# Altium PCB PCB1.PcbDoc
Units mm, origin at the board's own origin, x right, y up, seen from the top; angles counter-clockwise.
Board outline 50 x 50 mm, 4 copper layers (Top Layer, GND_t, GND_b, Bottom Layer), stack 0.442 mm thick; 82 components, 56 nets, 309 pads, 342 vias.
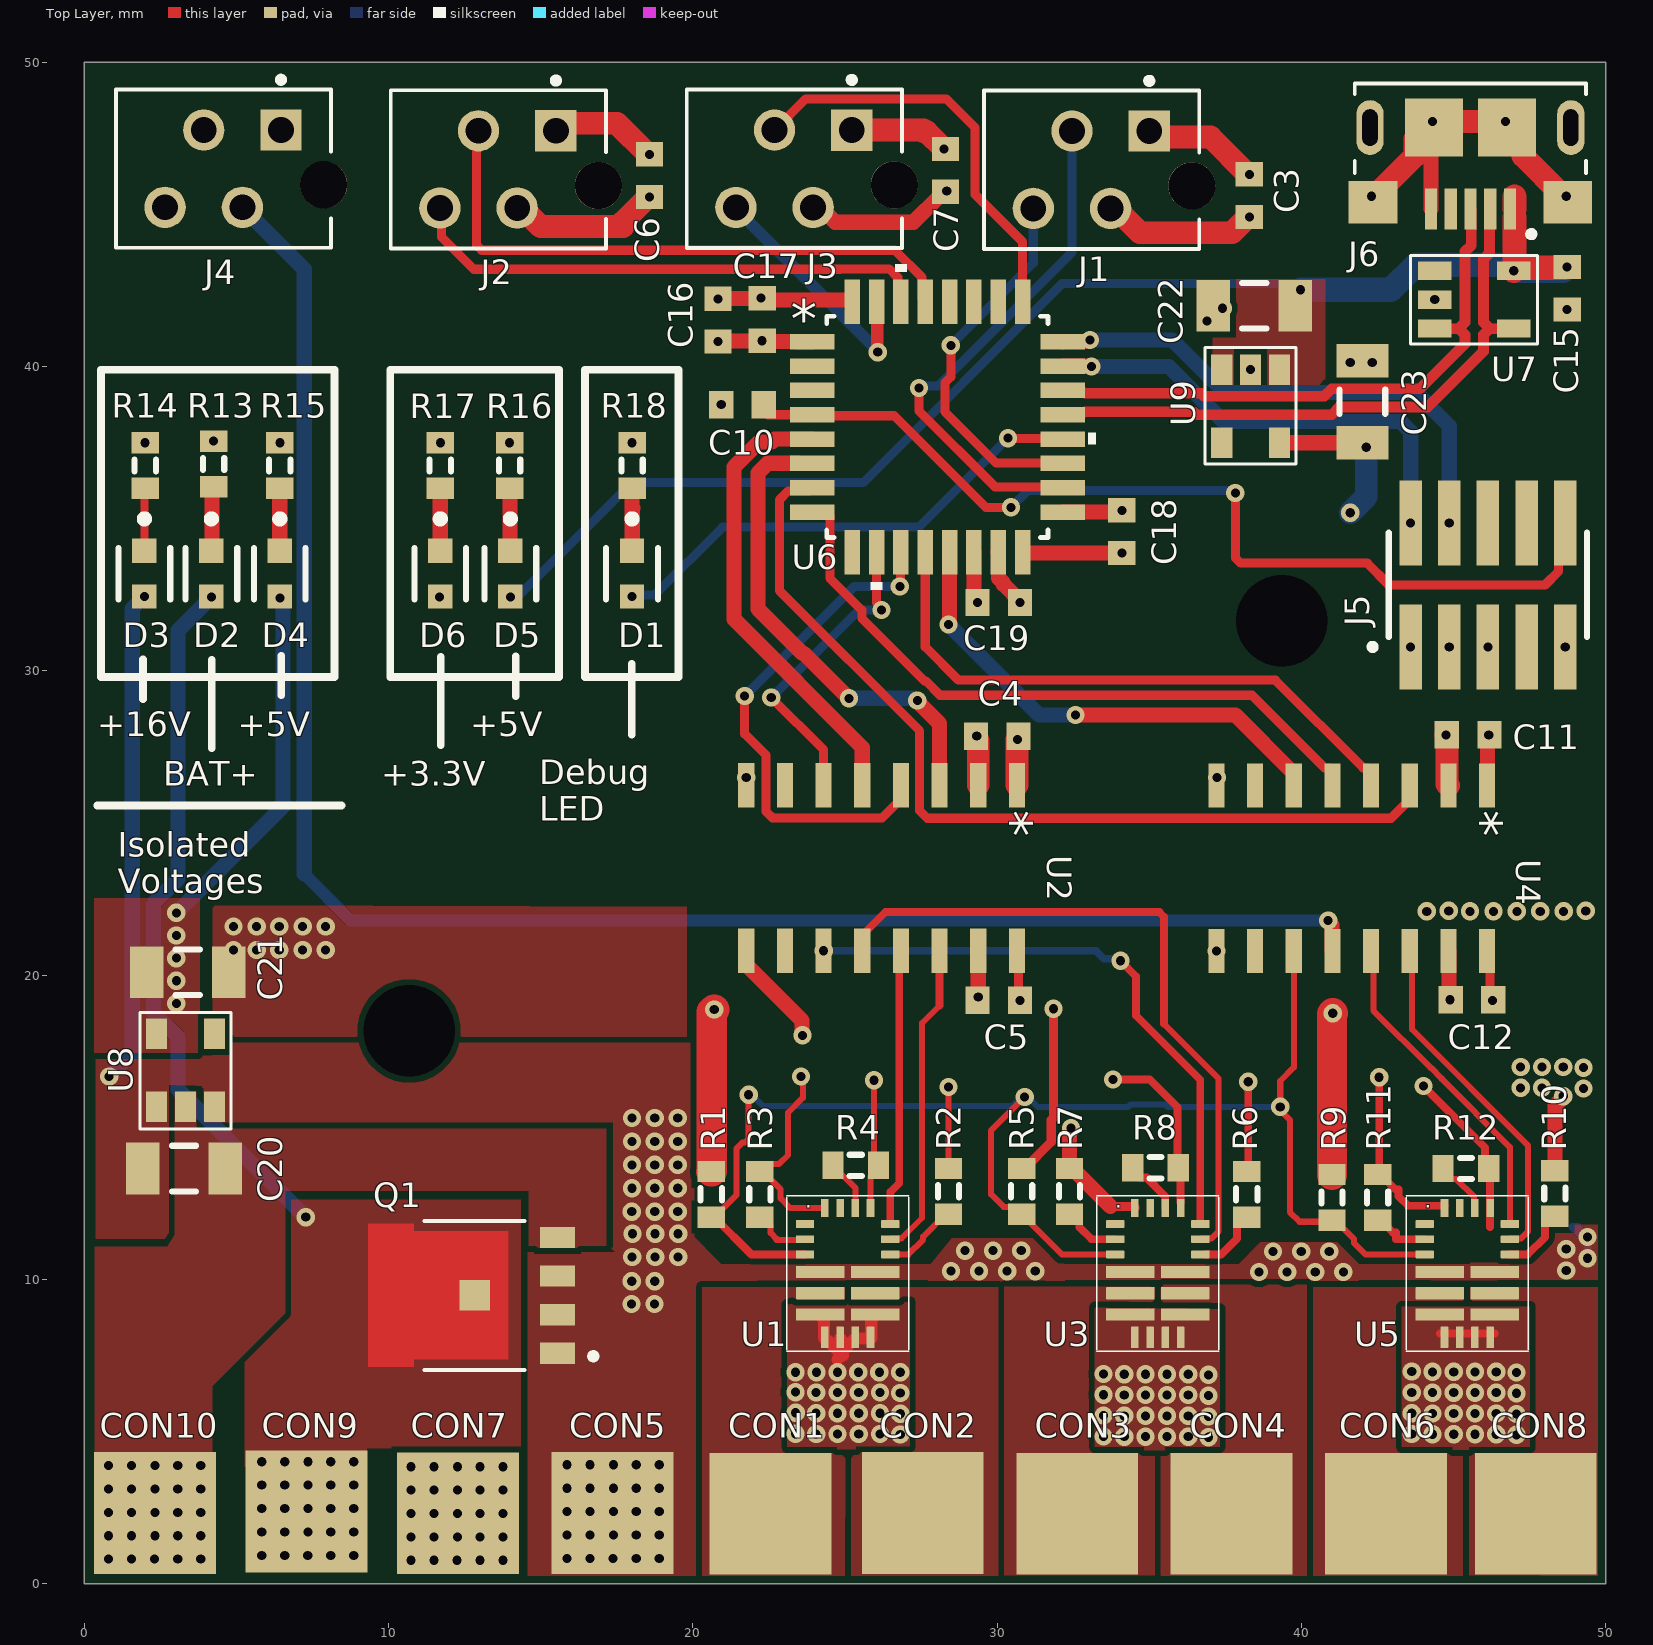
[diagram p0: Top Layer view]
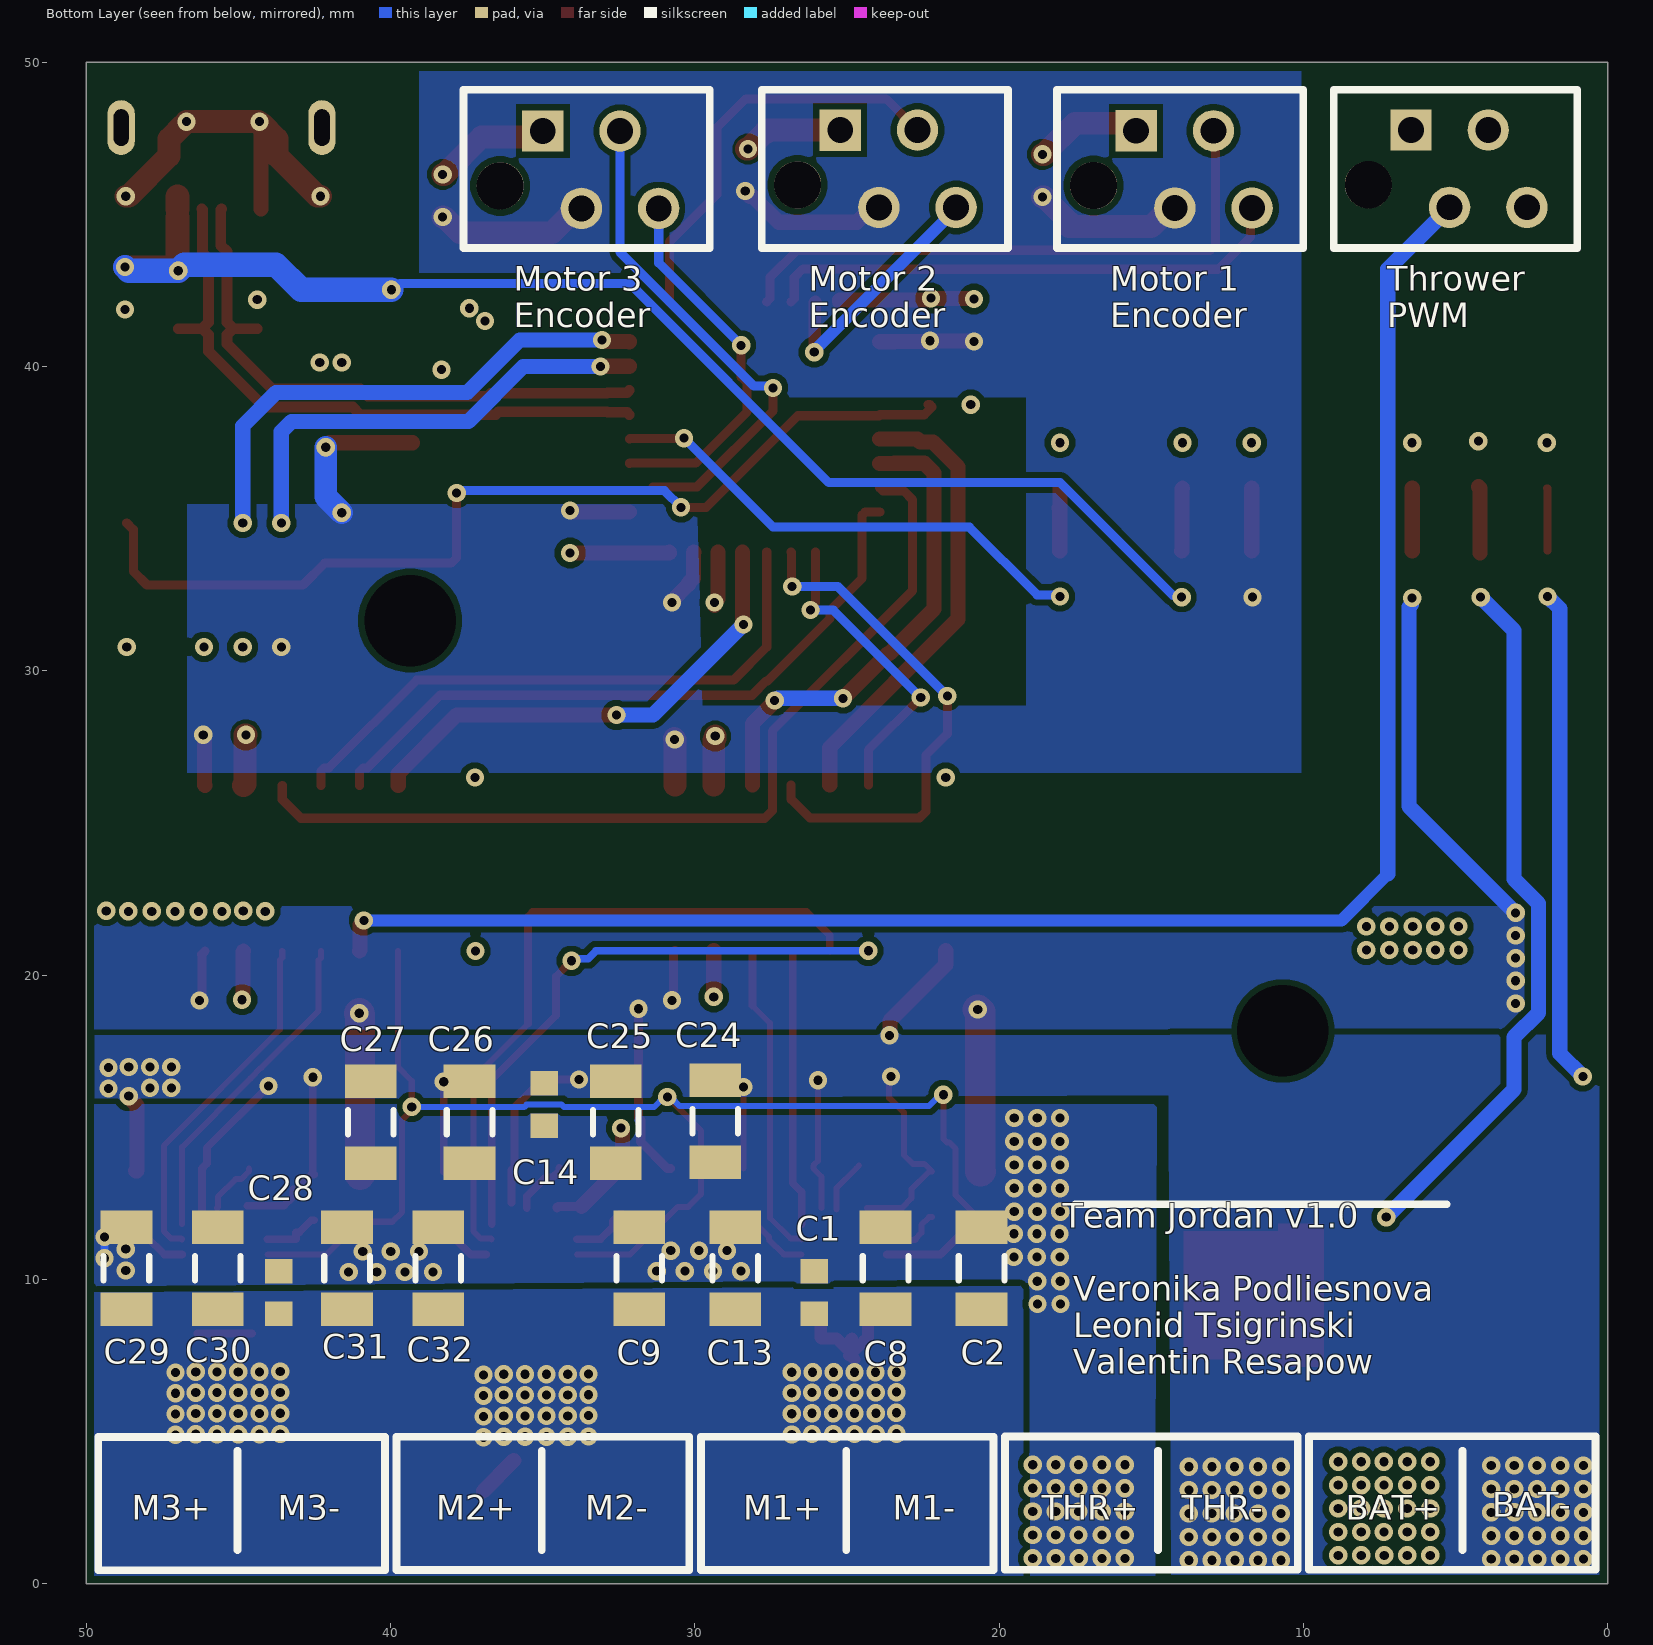
[diagram p1: Bottom Layer view, seen from below]
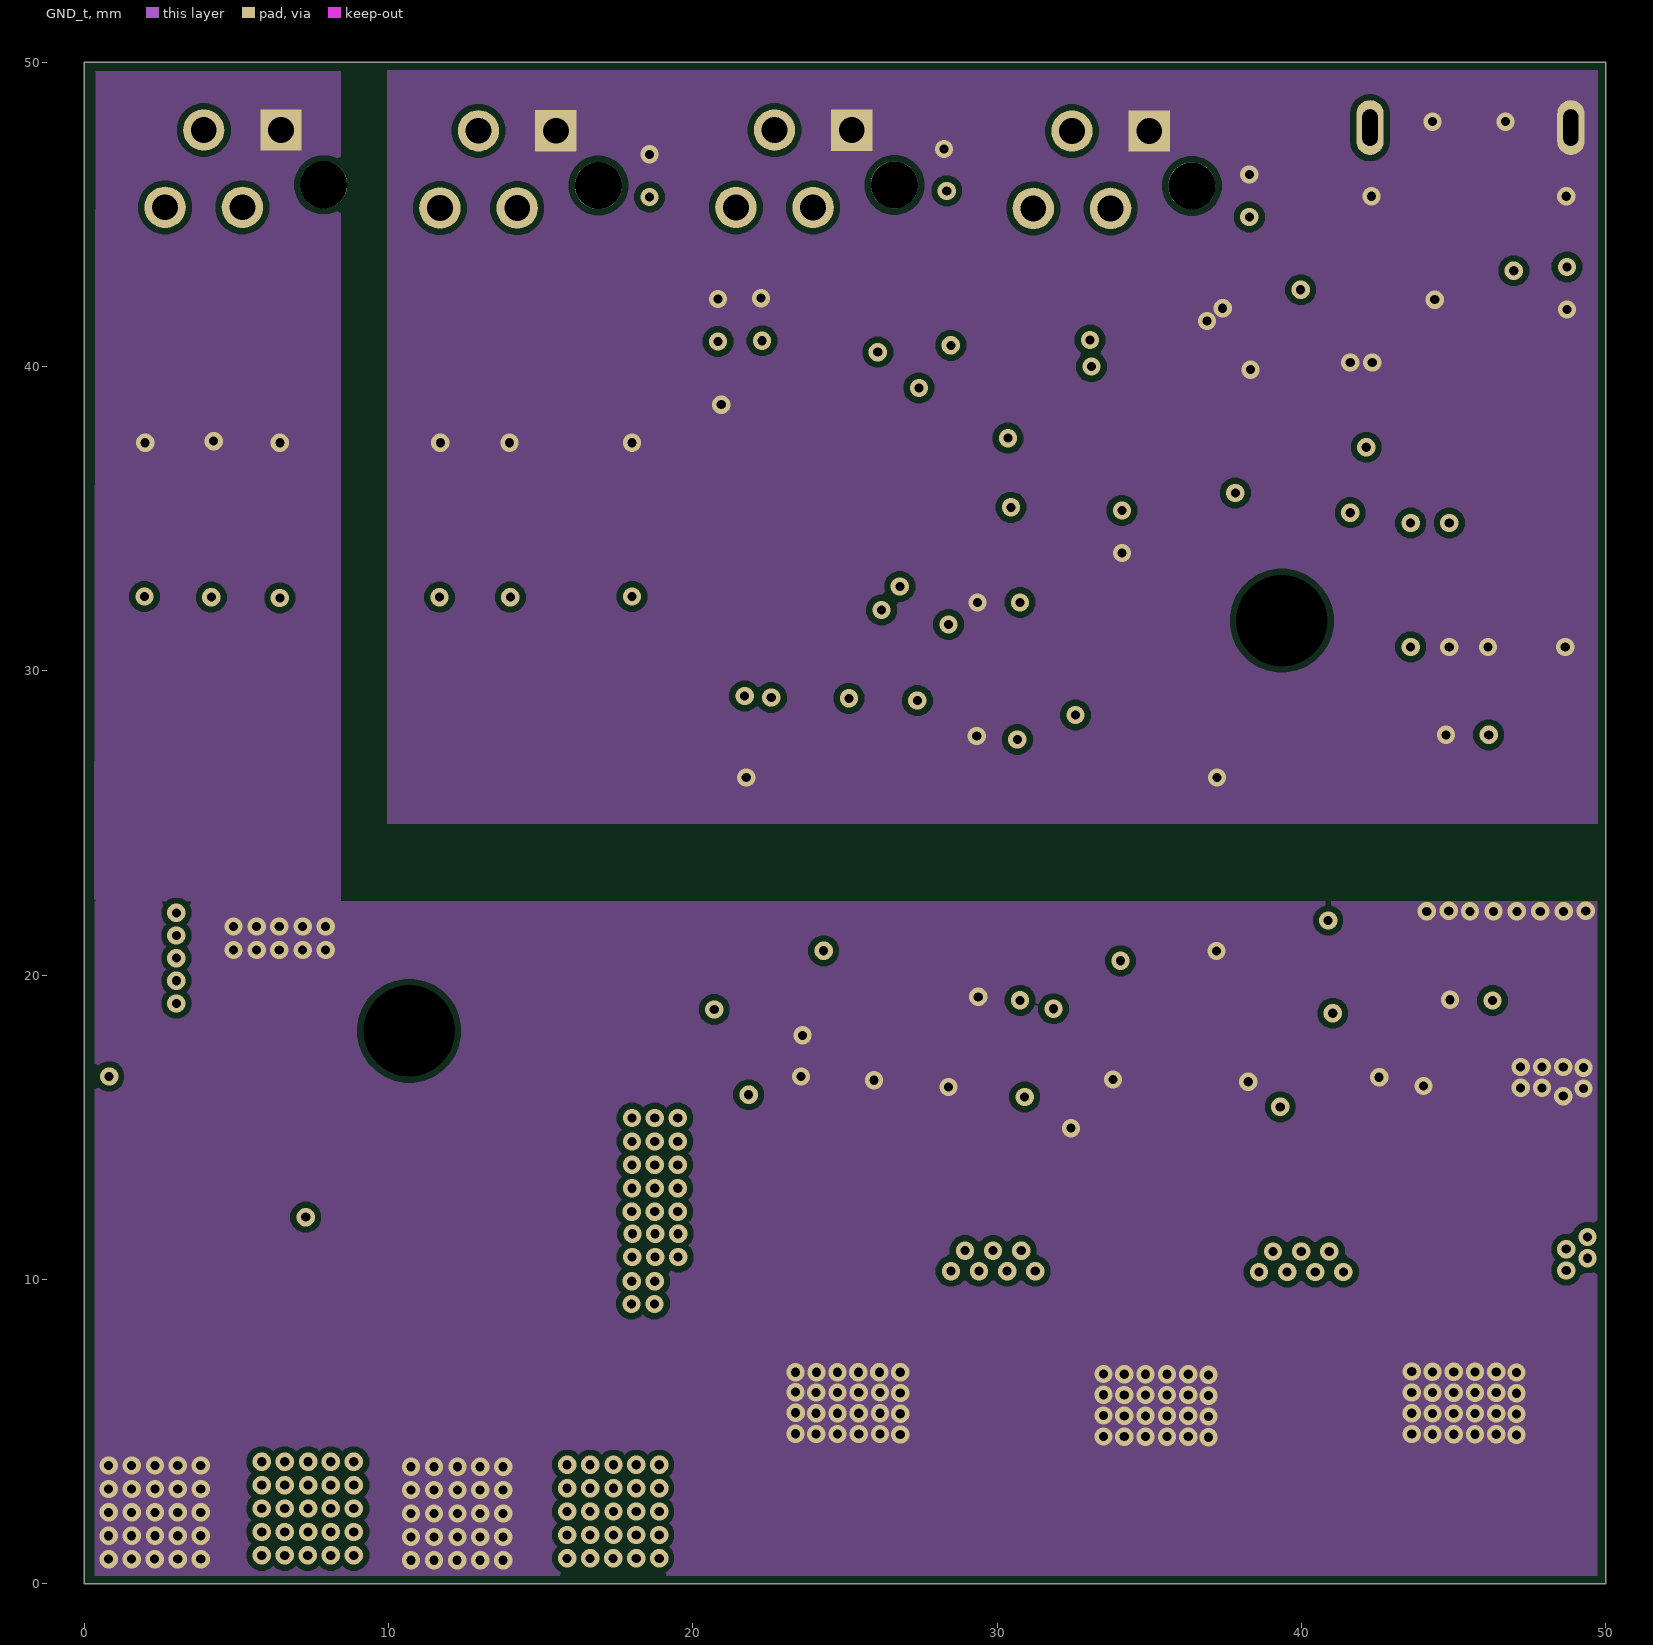
[diagram p2: GND_t]
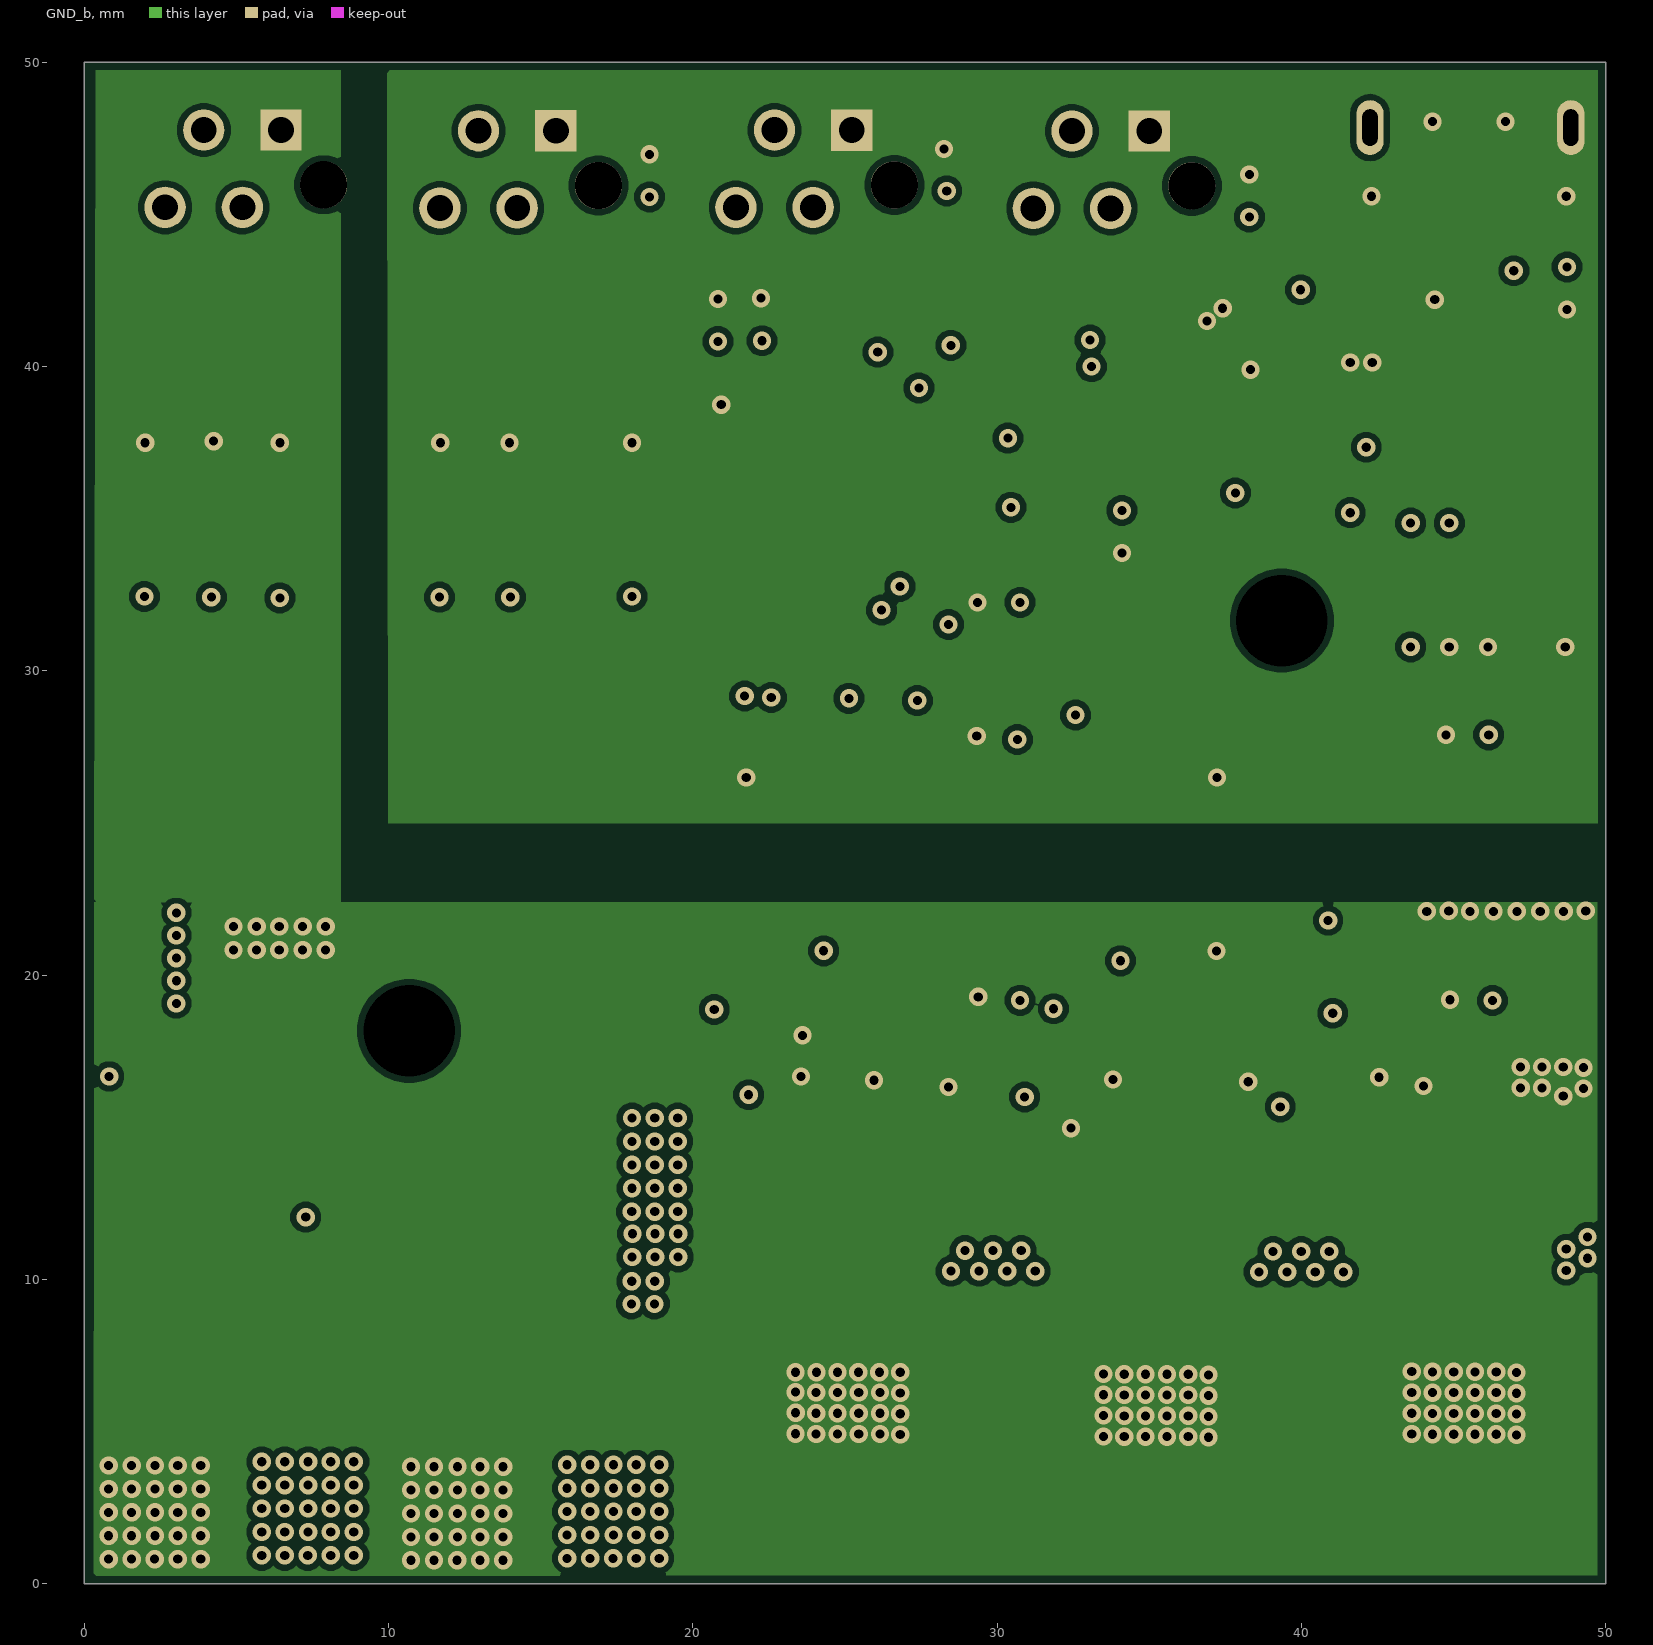
[diagram p3: GND_b]

## Layer stack, top to bottom
Top Solder: solder mask 0.0102, Solder Resist, Dk 3.5
Top Layer: signal copper 0.035
Dielectric 2: prepreg 0.1, PP-006, Dk 4.1
GND_t: signal copper 0.035
Dielectric 1: core 0.1016, Core-009, Dk 4.5
GND_b: signal copper 0.035
Dielectric 3: prepreg 0.1, PP-006, Dk 4.1
Bottom Layer: signal copper 0.035
Bottom Solder: solder mask 0.0102, Solder Resist, Dk 3.5

## Board outline
0,0 50,0 50,50 0,50

## Design rules (kind name [scope] priority, off if disabled: settings)
BoardOutlineClearance [All] p1: gap=0.254 ignorepadtopadclearanceinfootprint=FALSE except(0: Arc-SplitContinuation Track-SplitContinuation SMDPad-SplitContinuation THPad-SplitContinuation Via-SplitContinuation Fill-SplitContinuation Poly-SplitContinuation Region-SplitContinuation Text-SplitContinuation)
Clearance [All] p1: gap=0.2 ignorepadtopadclearanceinfootprint=TRUE except(0: Arc-Hole Track-Hole SMDPad-Hole THPad-Hole Via-Hole Fill-Hole Poly-Hole Region-Hole Text-Hole)
DiffPairsRouting [All] p1: maxlimit=0.254 minlimit=0.254 mostfreqgap=0.254 toplayer_minwidth=0.35 toplayer_maxwidth=0.381 toplayer_prefwidth=0.381 midlayer1_minwidth=0.35 midlayer1_maxwidth=0.381 midlayer1_prefwidth=0.381 midlayer2_minwidth=0.35 midlayer2_maxwidth=0.381 midlayer2_prefwidth=0.381 bottomlayer_minwidth=0.35 bottomlayer_maxwidth=0.381 bottomlayer_prefwidth=0.381 maxuncoupledlength=12.7
HoleSize [All] p1: absolutevalues=TRUE maxlimit=6 minlimit=0.025 maxpercent=80.000 minpercent=20.000
MinimumSolderMaskSliver [All] p1: minsoldermaskwidth=0.1
PolygonConnect [All] p1: connectstyle=Direct reliefconductorwidth=0.254 reliefentries=4 polygonreliefangle="90 Angle" airgapwidth=0.254
RoutingVias [All] p1: holewidth=0.3 width=0.6 viastyle="Through Hole" minholewidth=0.2 minwidth=0.45 maxholewidth=3 maxwidth=5
SolderMaskExpansion SolderMaskExpansionVIia [IsVia] p1: expansion=0.05 istentingtop=TRUE
SolderMaskExpansion SolderMaskExpansion_1 [All] p2: expansion=0.102 istentingtop=FALSE
Width [All] p1: maxlimit=2 minlimit=0.1 preferedwidth=0.254
27 further rules are at their usual default settings.

## Classes and differential pairs
differential pair class diff_USB: USB_D
component class Motorcontroller: C1 C2 C3 C4 C5 C6 C7 C8 C9 C11 C12 C13 C14 C24 C25 C26 C27 C28 C29 C30 C31 C32 CON1 CON2 CON3 CON4 CON5 CON6 CON7 CON8 J1 J2 J3 J4 R1 R2 R3 R4 R5 R6 R7 R8 R9 R10 R11 R12 U1 U2 U3 U4 U5
component class Mainboard: C10 C15 C16 C17 C18 C19 C20 C21 C22 C23 CON9 CON10 D1 D2 D3 D4 D5 D6 J5 J6 Q1 R13 R14 R15 R16 R17 R18 U6 U7 U8 U9
differential pair USB_D: +USB_D_P -USB_D_N

## Components (designator, comment, footprint, x,y, rotation, side; value= is the part's Value field where it differs from the comment)
C1 "Cap Semi" 1608[0603] 26.075,9.575 r90 bottom value=100nF
C2 "Cap Semi" C1206 20.575,10.375 r90 bottom value=1uF
C3 "Cap Semi" 1608[0603] 38.284,45.616 r270 top value=100nF
C4 "Cap Semi" 1608[0603] 30,27.85 r180 top value=100nF
C5 "Cap Semi" 1608[0603] 30.05,19.175 r180 top value=100nF
C6 "Cap Semi" 1608[0603] 18.574,46.275 r270 top value=100nF
C7 "Cap Semi" 1608[0603] 28.3,46.45 r270 top value=100nF
C8 "Cap Semi" C1206 23.729,10.375 r90 bottom value=1uF
C9 "Cap Semi" C1206 31.825,10.375 r90 bottom value=1uF
C10 "Cap Semi" 1608[0603] 21.629,38.75 r0 top value=100nF
C11 "Cap Semi" 1608[0603] 45.475,27.9 r180 top value=100nF
C12 "Cap Semi" 1608[0603] 45.6,19.2 r180 top value=100nF
C13 "Cap Semi" C1206 28.671,10.375 r90 bottom value=1uF
C14 "Cap Semi" 1608[0603] 34.95,15.75 r270 bottom value=100nF
C15 "Cap Semi" 1608[0603] 48.725,42.575 r90 top value=100nF
C16 "Cap Semi" 1608[0603] 20.824,41.525 r270 top value=1uF
C17 "Cap Semi" 1608[0603] 22.279,41.55 r270 top value=10nF
C18 "Cap Semi" 1608[0603] 34.096,34.575 r90 top value=100nF
C19 "Cap Semi" 1608[0603] 30.05,32.25 r0 top value=100nF
C20 "Cap Semi" C1206 3.275,13.646 r180 top value=1uF
C21 "Cap Semi" C1206 3.4,20.1 r180 top value=1uF
C22 "Cap Semi" C1206 38.45,42 r0 top value=1uF
C23 "Cap Semi" C1206 42,38.85 r270 top value=1uF
C24 "Cap Semi" C1206 29.325,15.2 r270 bottom value=1uF
C25 "Cap Semi" C1206 32.596,15.169 r270 bottom value=1uF
C26 "Cap Semi" C1206 37.4,15.169 r270 bottom value=1uF
C27 "Cap Semi" C1206 40.65,15.169 r270 bottom value=1uF
C28 "Cap Semi" 1608[0603] 43.675,9.575 r90 bottom value=100nF
C29 "Cap Semi" C1206 48.675,10.375 r90 bottom value=1uF
C30 "Cap Semi" C1206 45.675,10.375 r90 bottom value=1uF
C31 "Cap Semi" C1206 41.425,10.375 r90 bottom value=1uF
C32 "Cap Semi" C1206 38.425,10.375 r90 bottom value=1uF
CON1 "Moter1 +" con_soldering 22.65,2.3 r0 top
CON2 "Motor1 -" con_soldering 27.65,2.325 r0 top
CON3 "Motor2 +" con_soldering 32.725,2.3 r0 top
CON4 "Motor2 -" con_soldering 37.8,2.3 r0 top
CON5 "Thrower +" con_soldering 17.458,2.325 r0 top
CON6 "Motor3 +" con_soldering 42.875,2.3 r0 top
CON7 "Thrower -" con_soldering 12.383,2.325 r0 top
CON8 "Motor3 -" con_soldering 47.8,2.3 r0 top
CON9 "BAT+" con_soldering 7.403,2.375 r0 top
CON10 "BAT-" con_soldering 2.325,2.425 r90 top
D1 "LTST-C190GKT" FP-LTST-C190GKT-MFG 18,33.196 r270 top
D2 "LTST-C190GKT" FP-LTST-C190GKT-MFG 4.175,33.196 r270 top
D3 "LTST-C190GKT" FP-LTST-C190GKT-MFG 1.975,33.196 r270 top
D4 "LTST-C190GKT" FP-LTST-C190GKT-MFG 6.425,33.196 r270 top
D5 "LTST-C190GKT" FP-LTST-C190GKT-MFG 14,33.196 r270 top
D6 "LTST-C190GKT" FP-LTST-C190GKT-MFG 11.696,33.196 r270 top
J1 "Encoder_1" TE_7-215079-4 34.995,47.74 r0 top
J2 "Encoder_2" TE_7-215079-4 15.495,47.75 r0 top
J3 "Encoder_3" TE_7-215079-4 25.221,47.771 r0 top
J4 "PWM_thrower" TE_7-215079-4 6.465,47.775 r0 top
J5 "FTSH-105-XX-X-DV" SAMTEC_FTSH-105-XX-X-DV 46.125,32.825 r0 top
J6 "10118193-0001LF" FCI_10118193-0001LF 45.55,47.854 r180 top
Q1 "BUK6Y10-30P" TRANS_PSMN5R5-60YS,115 12.825,9.48 r180 top
R1 "Res3" J1-0603 20.6,12.8 r90 top value=1K
R2 "Res3" J1-0603 28.4,12.9 r90 top value=1K
R3 "Res3" J1-0603 22.2,12.8 r90 top value=1K
R4 "Res3" J1-0603 25.35,13.75 r0 top value=1K
R5 "Res3" J1-0603 30.8,12.9 r90 top value=1K
R6 "Res3" J1-0603 38.2,12.8 r90 top value=1K
R7 "Res3" J1-0603 32.375,12.9 r90 top value=1K
R8 "Res3" J1-0603 35.2,13.675 r0 top value=1K
R9 "Res3" J1-0603 41,12.7 r90 top value=1K
R10 "Res3" J1-0603 48.326,12.826 r90 top value=1K
R11 "Res3" J1-0603 42.5,12.7 r90 top value=1K
R12 "Res3" J1-0603 45.4,13.65 r0 top value=1K
R13 "Res3" J1-0603 4.25,36.8 r270 top value=1K
R14 "Res3" J1-0603 2,36.75 r270 top value=1K
R15 "Res3" J1-0603 6.425,36.75 r270 top value=1K
R16 "Res3" J1-0603 13.975,36.75 r270 top value=1K
R17 "Res3" J1-0603 11.7,36.75 r270 top value=1K
R18 "Res3" J1-0603 18,36.75 r270 top value=1K
U1 "PDRV8243HRXYQ1" DRV8243_motor_driver 25.087,10.2 r0 top
U2 "MAX14930AASE+" 21-0041_S16+1_MXM 26.2,23.525 r270 top
U3 "PDRV8243HRXYQ1" DRV8243_motor_driver 35.275,10.2 r0 top
U4 "MAX14930AASE+" 21-0041_S16+1_MXM 41.65,23.516 r270 top
U5 "PDRV8243HRXYQ1" DRV8243_motor_driver 45.446,10.2 r0 top
U6 "STM32G441KBT6" LQFP-32 28.035,38.018 r0 top
U7 "CM1223_ESD" CM1223_ESD 45.675,42.2 r270 top
U8 "NCV8730" NCP164CSN330T1G_Voltage_regulator 3.325,16.875 r180 top
U9 "NCP164" NCP164CSN330T1G_Voltage_regulator 38.325,38.7 r0 top

## Footprints (in the part's own frame and the unit in brackets; to place one, negate y for a bottom-side part, rotate by r counter-clockwise, add the part's x,y. Pads: shape width x height; smd on the part's side, far side on the other; paste and mask are expansions set on the pad)
21-0041_S16+1_MXM [mm]
  rect 1.456x0.533 smd paste+0 mask+0: 1(-2.722,4.445) 2(-2.722,3.175) 3(-2.722,1.905) 4(-2.722,0.635) 5(-2.722,-0.635) 6(-2.722,-1.905) 7(-2.722,-3.175) 8(-2.722,-4.445) 9(2.722,-4.445) 10(2.722,-3.175) 11(2.722,-1.905) 12(2.722,-0.635) 13(2.722,0.635) 14(2.722,1.905) 15(2.722,3.175) 16(2.722,4.445)
  body extent -3.1,-4.95 3.1,4.95, height 1.76
1608[0603] [mm] "Chip Capacitor, Body 1.6x0.8mm, IPC High Density"
  rect 0.8x0.9 smd: 1(-0.7,0) 2(0.7,0)
  body extent -0.87,-0.48 0.87,0.48, height 1.3
C1206 [mm] "Chip Capacitor, Body 3.2x1.6mm, IPC High Density"
  rect 1.1x1.7 smd: 1(-1.35,0) 2(1.35,0)
  silkscreen extent -0.4,-0.75 0.4,0.75, body extent -1.7,-0.9 1.7,0.9, height 1.3
CM1223_ESD [mm]
  rect 0.6x1.1 smd: 1(-0.95,-1.3) 2(0,-1.3) 3(0.95,-1.3) 4(0.95,1.3) 5(-0.95,1.3)
  silkscreen extent -1.45,-2.1 1.45,2.08
con_soldering [mm]
  rect 4x4 smd: 1(-0.1,0)
DRV8243_motor_driver [mm]
  rrect10% 0.6x0.25 smd: 1(-1.4,1.625) 2(-1.4,1.125) 3(-1.4,0.625) 8(1.4,0.625) 9(1.4,1.125) 10(1.4,1.625)
  rrect10% 1.6x0.4 smd: 4(-0.9,0.05) 4(0.9,0.05) 5(-0.9,-0.65) 6(-0.9,-1.35) 6(0.9,-1.35) 7(0.9,-0.65)
  rrect10% 0.25x0.7 smd: 6(-0.75,-2.1) 6(-0.25,-2.1) 6(0.25,-2.1) 6(0.75,-2.1)
  rrect10% 0.25x0.6 smd: 11(0.75,2.15) 12(0.25,2.15) 13(-0.25,2.15) 14(-0.75,2.15)
  silkscreen extent -2,-2.55 2,2.55
FCI_10118193-0001LF [mm]
  rect 0.4x1.35 smd: 1(-1.3,2.675) 2(-0.65,2.675) 3(0,2.675) 4(0.65,2.675) 5(1.3,2.675)
  rect 1.6x1.4 smd: S1(-3.2,2.45) S2(3.2,2.45)
  rect 1.9x1.9 smd: S3(1.2,0) S4(-1.2,0)
  oval 0.9x1.8 hole 0.5 slot 1.2 at 90 deg: S5(-3.3,0) S6(3.3,0)
  silkscreen extent -3.8,-1.45 3.8,3.6
FP-LTST-C190GKT-MFG [mm]
  rect 0.8x0.8 smd paste+0 mask+0: 1(-0.75,0) 2(0.75,0)
  silkscreen extent -1.92,-0.85 0.85,0.85, body extent -1.25,-0.55 1.25,0.55, height 0.25
J1-0603 [mm] "Chip Resistor, Body 1.6x0.8mm, IPC High Density"
  rect 0.7x0.9 smd: 1(-0.75,0) 2(0.75,0)
  silkscreen extent -0.2,-0.35 0.2,0.35, body extent -0.85,-0.48 0.85,0.48, height 0.9
LQFP-32 [mm]
  rect 1.462x0.507 smd paste+0 mask+0: 1(-4.115,2.8) 2(-4.115,2) 3(-4.115,1.2) 4(-4.115,0.4) 5(-4.115,-0.4) 6(-4.115,-1.2) 7(-4.115,-2) 8(-4.115,-2.8) 17(4.115,-2.8) 18(4.115,-2) 19(4.115,-1.2) 20(4.115,-0.4) 21(4.115,0.4) 22(4.115,1.2) 23(4.115,2) 24(4.115,2.8)
  rect 0.507x1.462 smd paste+0 mask+0: 9(-2.8,-4.115) 10(-2,-4.115) 11(-1.2,-4.115) 12(-0.4,-4.115) 13(0.4,-4.115) 14(1.2,-4.115) 15(2,-4.115) 16(2.8,-4.115) 25(2.8,4.115) 26(2,4.115) 27(1.2,4.115) 28(0.4,4.115) 29(-0.4,4.115) 30(-1.2,4.115) 31(-2,4.115) 32(-2.8,4.115)
  silkscreen extent -3.63,-5.35 5.21,5.35, body extent -4.5,-4.5 4.5,4.5, height 1.6
NCP164CSN330T1G_Voltage_regulator [mm] "For NCP164CSN330T1G_Voltage_regulator and for NCV8730"
  rect 0.7x1 smd: 1(0.95,1.2) 2(0,1.2) 3(-0.95,1.2) 4(-0.95,-1.2) 5(0.95,-1.2)
  silkscreen extent -1.5,-1.9 1.5,1.92
SAMTEC_FTSH-105-XX-X-DV [mm]
  rect 0.74x2.79 smd: 01(-2.54,-2.035) 02(-2.54,2.035) 03(-1.27,-2.035) 04(-1.27,2.035) 05(0,-2.035) 06(0,2.035) 07(1.27,-2.035) 08(1.27,2.035) 09(2.54,-2.035) 10(2.54,2.035)
  silkscreen extent -3.89,-2.13 3.26,1.72, body extent -3.17,-2.92 3.17,2.92, height 6.13
TE_7-215079-4 [mm]
  rect 1.358x1.358 hole 0.85: 1(0,0)
  round 1.358 hole 0.85: 2(-1.27,-2.54) 3(-2.54,0) 4(-3.81,-2.54)
  round 1.55 hole 1.55 unplated: ""(1.4,-1.8)
  silkscreen extent -5.43,-3.87 1.65,1.75
TRANS_PSMN5R5-60YS,115 [mm]
  rect 1x1 smd paste-1 mask+0: D(0,0)
  rect 1.15x0.7 smd paste-2 mask+0: G(-2.725,-1.905) S(-2.725,1.905) S(-2.725,-0.635) S(-2.725,0.635)
  Top Layer region: 3.5,-2.35 2,-2.35 2,-2.1 -1.1,-2.1 -1.1,2.1 2,2.1 2,2.35 3.5,2.35
  silkscreen extent -4,-2.45 1.65,2.45, body extent -3,-2.45 3,2.45, height 1.2

## Part data
C1 C2 C3 C4 C5 C6 C7 C8 C9 C10 C11 C12 C13 C14 C15 C16 C17 C18 C19 C20 C21 C22 C23 C24 C25 C26 C27 C28 C29 C30 C31 C32: "Capacitor (Semiconductor SIM Model)", LatestRevisionDate=29-May-2009, LatestRevisionNote="IPC-7351 Footprint Added.", PackageDescription="Chip Capacitor", PackageReference=C1206, Published=8-Jun-2000, Publisher="Altium Limited"
CON1 CON2 CON3 CON4 CON5 CON6 CON7 CON8 CON9 CON10: library part Con_soldering
D1 D2 D3 D4 D5 D6: library part CMP-22017-000005-2, "LED GREEN CLEAR CHIP SMD", Case Code (Imperial)=0603, Case Code (Metric)=1608, Color=Green, Forward Current=30mA, Forward Voltage=2.1V, Lens Color=Colorless, Max Operating Temperature=85°C, Min Operating Temperature=-55°C, Package Quantity=1, Power Dissipation=100mW, Reverse Voltage=5V, Test Current=10mA, Voltage=2V, Case/Package=0603, Depth=0.8mm, Dominant Wavelength=569nm, Height=0.8mm, Illumination Color=Green, Lead Free="Lead Free", Length=1.6mm, Lens Style=Clear, Lens Transparency=Clear, Luminous Intensity=6mcd, Mount="Surface Mount", Number of Elements=1, Number of LEDs=1, Number of Pins=2, Packaging="Tape and Reel", Power Rating=100mW, Radiation Hardening=No, Viewing Angle=130°, Wavelength=565nm, Width=0.8mm
J1 J2 J3 J4: library part Con_4_encoder, "Micro-MaTch 4 Position 1.27 mm Pitch Vertical Female-on-Board Connector", Package=SMD-6, Availability=Unavailable, MF="TE Connectivity", MP=7-215079-4, Price=None, SnapEDA_Link=https://www.snapeda.com/parts/7-215079-4/TE%20Connectivity%20AMP%20Connectors/view-part/453401/?ref=snap
J5: "Connector Header Surface Mount 10 position 0.050\" (1.27mm)", Package=None, Availability=Unavailable, MP=FTSH-105-XX-X-DV, Price=None
J6: "USB - micro B USB 2.0 Receptacle Connector 5 Position Surface Mount, Right Angle; Through Hole", Package=None, Availability=Unavailable, MF="Amphenol ICC", MP=10118193-0001LF, Price=None, SnapEDA_Link=https://www.snapeda.com/parts/10118193-0001LF/Amphenol%20FCI/view-part/2758989/?ref=snap
R1 R2 R3 R4 R5 R6 R7 R8 R9 R10 R11 R12 R13 R14 R15 R16 R17 R18: "Resistor", LatestRevisionDate=29-May-2009, LatestRevisionNote="IPC-7351 Footprint Added.", PackageDescription="Chip Resistor", PackageReference=J1-0603, Published=8-Jun-2000, Publisher="Altium Limited"
U2 U4: "No Description Available", Mfr_Name="Maxim Integrated Products", Copyright="Copyright (C) 2021 Ultra Librarian. All rights reserved.", Manufacturer_Part_Number=MAX14930AASE+, RefDes=RefDes, Type=DEV
U6: "No Description Available", Mfr_Name=STMicroelectronics, Copyright="Copyright (C) 2021 Ultra Librarian. All rights reserved.", Digi-Key_Part_Number_1=STM32G441KBT6-ND, Manufacturer_Part_Number=STM32G441KBT6, RefDes=RefDes, Type=DEV

## Free pads (board coordinates)
  round 1.524 hole 3: 2(10.675,18.175) 3(39.35,31.65)

## Via types
v1: diameter 0.6, hole 0.3, Top Layer to Bottom Layer, tented both sides, 342 vias

## Nets (pads, with @x,y where several pads share a name; then routed paths per layer and width w, separated by ;. In a path a pad name is that pad's centre, name@x,y a point inside that pad or via, vN(x,y) a via of type N, cw(c..) or ccw(c..) an arc to the next point about the centre after c; other vN are vias at no path point)
+3.3V: C3.2 C4.1 C6.2 C7.2 C11.1 C16.2 C17.2 C18.2 C19.2 C23.2 D6.2 J1.2 J2.2 J3.2 J5.01 U2.1 U4.1 U6.1 U6.15 U6.17 U9.5 | length 30.8
  Top Layer w0.5: v1(20.824,40.825) 20.837,40.837 22.26,40.837 v1(22.273,40.85) ; C17.2 v1(22.273,40.85) ; U6.1 23.443,40.818 23.439,40.822 22.301,40.822 v1(22.273,40.85) ; J3.2 24.183,45.231 24.668,44.746 27.246,44.746 28.1,45.6 28.2,45.6 28.375,45.775 v1(28.341,45.775) ; U6.15 30.039,33.9 30.039,33.048 30.2,32.886 30.2,32.85 30.75,32.3 v1(30.75,32.25) ; U6.17 32.153,35.222 34.043,35.222 v1(34.096,35.275) ; U9.5 C23.2 42.125,37.375 v1(42.125,37.35) ; U4.1 46.111,26.254 46.111,27.861 v1(46.15,27.9)
  Top Layer w0.75: J2.2 14.39,45.21 15,44.6 17.699,44.6 17.699,44.75 18.524,45.575 v1(18.574,45.575) ; U2.1 30.645,27.745 C4.1@30.675,27.775 ; J1.2 33.89,45.2 34.69,44.399 37.717,44.399 38.209,44.891 38.259,44.891 v1(38.284,44.916)
  Bottom Layer w0.75: v1(41.6,35.2) 42.125,35.725 v1(42.125,37.35)
  other v1: 30.66,27.744 43.585,30.79 11.675,32.425
+5V: C15.2 C22.2 D5.2 J6.1 U7.5 U9.1 U9.3 | length 43.1
  Top Layer w0.8: v1(46.975,43.15) U7.5@47,43.175 ; J6.1@47,44.904 U7.5@47,43.175 ; J6.1@47,45.179 J6.1@47,45.587 ; v1(48.725,43.275) 48.675,43.275 48.65,43.25 47.075,43.25 U7.5@47,43.175
  Bottom Layer w0.3: v1(14,32.425) 14.057,32.482 14.287,32.482 17.995,36.19 25.592,36.19 32.134,42.732 39.686,42.732
  Bottom Layer w0.8: v1(39.971,42.525) 42.935,42.525 43.76,43.35 46.775,43.35 v1(46.975,43.15) 48.6,43.15 v1(48.725,43.275)
+5V_P: C5.1 C12.1 C21.2 D4.2 R1.2 R5.2 R9.2 U2.16 U4.16 U8.5 | length 31.7
  Top Layer w0.3: U2.16 30.698,20.751 30.698,19.227 v1(30.75,19.175) ; R5.2 30.9,13.65 31.775,14.525 31.775,15.244 31.85,15.319 v1(31.85,18.9) ; U4.16 46.211,20.677 46.197,20.663 46.197,19.246 v1(46.275,19.169) 46.3,19.194 C12.1
  Top Layer w1: R1.2 20.625,13.55 20.625,18.8 v1(20.7,18.875) ; R9.2 41,18.725 v1(41.025,18.75)
  Bottom Layer w0.5: v1(3.025,22.05) 6.525,25.55 6.525,32.098 6.444,32.179 6.444,32.381 v1(6.425,32.4)
  other v1: 3.025,19.075 3.025,19.819 3.025,20.562 3.025,21.306
+16V: C1.2 C2.2 C8.2 C9.2 C13.2 C14.2 C20.2 C24.2 C25.2 C26.2 C27.2 C28.2 C29.2 C30.2 C31.2 C32.2 CON5.1 D3.2 Q1.S U1.4 U3.4 U5.4 U8.1 U8.3 | length 18.2
  Bottom Layer w0.254: v1(49.4,10.7) 49.398,10.702 49.398,11.302 49.327,11.302 48.99,11.639 48.904,11.725 49.075,11.725 v1(49.4,11.4)
  Bottom Layer w0.5: v1(0.817,16.676) 1.575,17.434 1.575,32.046 v1(1.975,32.446)
  other v1: 15.867,0.838 16.623,0.838 17.379,0.838 18.135,0.838 18.892,0.838 15.867,1.606 16.623,1.606 17.392,1.606 18.135,1.606 18.892,1.606 15.867,2.375 16.623,2.375 17.392,2.375 18.135,2.375 18.892,2.375 15.867,3.144 16.623,3.144 17.392,3.144 18.135,3.144 18.892,3.144 15.867,3.912 16.623,3.912 17.392,3.912 18.135,3.912 18.892,3.912 17.978,9.198 18.734,9.198 17.989,9.945 18.746,9.945 38.602,10.25 39.526,10.25 40.45,10.25 41.374,10.25 28.478,10.275 29.402,10.275 30.326,10.275 31.25,10.275 48.7,10.3 18.003,10.738 18.759,10.738 19.515,10.738 39.064,10.925 39.988,10.925 40.912,10.925 28.94,10.95 29.864,10.95 30.788,10.95 48.7,11 18.015,11.506 18.759,11.506 19.515,11.506 17.988,12.231 18.744,12.231 19.5,12.231 18,13 18.744,13 19.5,13 18,13.769 18.744,13.769 19.5,13.769 18,14.537 18.744,14.537 19.5,14.537 18,15.306 18.744,15.306 19.5,15.306
BAT+: CON9.1 D2.2 Q1.D | length 23.2
  Bottom Layer w0.5: v1(4.175,32.425) 3.075,31.325 3.075,23.161 2.275,22.361 2.275,18.764 3.075,17.964 3.075,16.25 v1(7.275,12.05)
  other v1: 5.831,0.938 6.587,0.938 7.343,0.938 8.099,0.938 8.856,0.938 5.831,1.706 6.587,1.706 7.356,1.706 8.099,1.706 8.856,1.706 5.831,2.475 6.587,2.475 7.356,2.475 8.099,2.475 8.856,2.475 5.831,3.244 6.587,3.244 7.356,3.244 8.099,3.244 8.856,3.244 5.831,4.012 6.587,4.012 7.356,4.012 8.099,4.012 8.856,4.012
GND: C3.1 C4.2 C6.1 C7.1 C10.1 C11.2 C15.1 C16.1 C17.1 C18.1 C19.1 C22.1 C23.1 J1.1 J2.1 J3.1 J5.03 J5.05 J5.09 J6.5 J6.S1 J6.S2 J6.S3 J6.S4 J6.S5 R16.1 R17.1 R18.1 U2.2 U2.8 U4.2 U4.8 U6.14 U6.16 U6.32 U7.2 U9.2 | length 35.4
  Top Layer w0.254: J6.S3@44.227,47.977 v1(44.3,48.05)
  Top Layer w0.5: v1(20.824,42.225) 20.837,42.237 22.226,42.237 v1(22.239,42.25) ; C17.1 v1(22.239,42.25) ; U6.32 25.235,42.188 25.231,42.191 22.297,42.191 v1(22.239,42.25) ; U6.14 29.239,33.9 29.239,32.361 v1(29.35,32.25) ; C19.1@29.347,32.147 29.35,32.15 C19.1@29.35,32.3 ; U6.16 30.835,33.88 30.839,33.877 34.07,33.877 34.095,33.877 v1(34.096,33.875) ; J6.5 44.25,47.754 J6.S3
  Top Layer w0.75: J2.1 15.744,47.999 17.5,47.999 18.524,46.975 v1(18.574,46.975) ; J3.1 27.579,47.771 27.579,47.721 27.679,47.721 v1(28.25,47.15) C7.1 ; v1(29.325,27.859) 29.325,27.775 29.375,27.725 U2.2 ; J1.1 35.186,47.549 35.205,47.549 35.212,47.542 37.008,47.542 38.234,46.316 v1(38.284,46.316) ; v1(42.3,45.6) 42.35,45.6 42.4,45.6 43.725,46.925 43.725,47.475 J6.S3@44.227,47.977 ; J6.S3@44.35,48.05 v1(46.7,48.05) ; v1(44.75,27.9) C11.2 44.775,26.287 U4.2 ; J6.S4@46.823,47.927 47.275,47.475 47.275,46.925 48.6,45.6 v1(48.7,45.6)
  other v1: 21.75,26.5 37.225,26.5 44.855,30.79 46.125,30.79 48.665,30.79 11.7,37.5 13.975,37.5 18,37.5 20.929,38.75 38.325,39.9 41.6,40.131 42.325,40.131 36.896,41.5 48.725,41.875 37.407,41.916 44.375,42.2
NetCON1_1: CON1.1 U1.5
NetCON2_1: CON2.1 U1.7
NetCON3_1: CON3.1 U3.5
NetCON4_1: CON4.1 U3.7 | length 1.4
  Top Layer w0.5: CON4.1@35.95,4.05 CON4.1@36.944,3.056
NetCON6_1: CON6.1 U5.5
NetCON8_1: CON8.1 U5.7
NetD1_1: D1.1 R18.2 | length 3.5
  Top Layer w0.5: D1.1 R18.2 ; D1.1@18.013,33.946 18.013,35.342 18.025,35.354
NetD1_2: D1.2 U6.20 | length 16.3
  Top Layer w0.3: v1(30.35,37.65) 30.366,37.634 32.134,37.634 U6.20
  Bottom Layer w0.3: v1(18,32.446) 18.054,32.5 18.75,32.5 20.975,34.725 27.425,34.725 v1(30.35,37.65)
NetD2_1: D2.1 R13.2 | length 2.2
  Top Layer w0.5: D2.1@4.2,33.875 4.2,36 R13.2
NetD3_1: D3.1 R14.2 | length 2.1
  Top Layer w0.254: D3.1 1.975,36 R14.2
NetD4_1: D4.1 R15.2 | length 2.1
  Top Layer w0.5: D4.1 6.425,34.096 R15.2
NetD5_1: D5.1 R16.2 | length 2.1
  Top Layer w0.5: R16.2 13.988,35.988 13.988,33.958 D5.1
NetD6_1: D6.1 R17.2 | length 2.1
  Top Layer w0.5: D6.1 11.698,33.948 11.698,35.998 R17.2
NetJ1_3: J1.3 U6.18 | length 16.6
  Top Layer w0.3: v1(27.425,39.3) 27.425,38.55 29.925,36.05 31.375,36.05
  Bottom Layer w0.3: v1(27.425,39.3) 27.482,39.357 28.052,39.357 32.455,43.761 J1.3
NetJ1_4: J1.4 U6.19 | length 12.5
  Top Layer w0.3: v1(28.475,40.7) 28.475,39.666 28.28,39.472 28.28,38.52 29.969,36.831 32.137,36.831 U6.19
  Bottom Layer w0.3: v1(28.475,40.7) 31.185,43.41 J1.4
NetJ2_3: J2.3 U6.29 | length 19.7
  Top Layer w0.3: J2.3 12.883,47.678 12.883,44.001 13.059,43.825 26.635,43.825 27.532,42.929 27.532,42.236 U6.29
NetJ2_4: J2.4 U6.30 | length 17.4
  Top Layer w0.3: J2.4 11.736,45.159 11.736,44.264 12.8,43.2 24.823,43.2 24.836,43.214 26.446,43.214 26.731,42.929 26.731,42.237 U6.30
NetJ3_3: J3.3 U6.25 | length 13.8
  Top Layer w0.3: J3.3 23.71,48.8 28.325,48.8 29.275,47.85 29.275,45.655 30.835,44.095 U6.25
NetJ3_4: J3.4 U6.31 | length 8.4
  Top Layer w0.4: U6.31 26.055,42.113 26.055,40.495 v1(26.075,40.475)
  Bottom Layer w0.4: J3.4 21.411,45.185 26.075,40.521 v1(26.075,40.475)
NetR2_1: R2.1 U1.8 | length 2.5
  Top Layer w0.2: U1.8 27.075,10.825 27.562,11.312 27.562,11.412 28.3,12.15 R2.1
NetR3_1: R3.1 U1.2 | length 2
  Top Layer w0.2: R3.1 22.3,12.05 22.55,11.8 22.55,11.532 22.74,11.342 22.74,11.3 U1.2@23.687,11.3
NetR4_1: R4.1 U1.12 | length 1.7
  Top Layer w0.2: R4.1 24.7,13.65 25.336,13.014 U1.12@25.336,12.312
NetR6_1: R6.1 U3.8 | length 2.1
  Top Layer w0.254: U3.8@36.848,10.825 37.356,10.825 37.877,11.346 37.877,11.827 38.1,12.05 R6.1
NetR7_1: R7.1 U3.2 | length 2
  Top Layer w0.254: R7.1 32.475,12.15 32.698,11.927 32.698,11.727 33.1,11.325 U3.2
NetR8_1: R8.1 U3.12 | length 1.9
  Top Layer w0.254: R8.1 34.45,13.575 34.673,13.352 34.903,13.352 35.525,12.73 U3.12
NetR10_1: R10.1 U5.8 | length 2.3
  Top Layer w0.254: U5.8 46.848,10.827 47.434,10.827 48.003,11.396 48.003,11.853 48.226,12.076 R10.1
NetR11_1: R11.1 U5.2 | length 1.9
  Top Layer w0.254: R11.1 42.6,11.95 43,11.55 43.1,11.55 43.1,11.325 U5.2
NetR12_1: R12.1 U5.12 | length 1.8
  Top Layer w0.2: R12.1 44.65,13.55 44.9,13.3 45.088,13.3 45.671,12.717 45.671,12.375 U5.12
NetU2_3: U2.3 U6.6 | length 15.9
  Top Layer w0.5: U6.6 23.443,36.818 23.439,36.822 22.939,36.822 22.934,36.827 22.462,36.827 22.142,36.507 22.142,32.033 23.599,30.576 23.649,30.576 v1(25.125,29.1) ; v1(27.375,29.025) 27.375,29 28.105,28.27 28.105,26.272 U2.3
  Bottom Layer w0.5: v1(25.125,29.1) 27.273,29.1 27.348,29.025 v1(27.375,29.025)
NetU2_4: U2.4 U6.11 | length 17.1
  Top Layer w0.3: v1(21.7,29.175) 21.7,27.935 22.405,27.23 22.405,25.378 22.614,25.169 26.219,25.169 26.835,25.785 U2.4 ; v1(26.8,32.775) 26.818,32.793 26.818,33.886 U6.11
  Bottom Layer w0.3: v1(21.7,29.175) 25.3,32.775 v1(26.8,32.775)
NetU2_5: U2.5 U6.5 | length 15.2
  Top Layer w0.5: U6.5 22.684,37.618 22.593,37.527 22.172,37.527 21.35,36.705 21.35,31.7 25.565,27.485 25.565,26.297 U2.5
NetU2_6: U2.6 U6.10 | length 10.4
  Top Layer w0.3: v1(22.575,29.125) 24.295,27.405 24.295,26.297 U2.6 ; U6.10 26.035,32.246 26.2,32.081 v1(26.2,32)
  Bottom Layer w0.3: v1(22.575,29.125) 25.45,32 v1(26.2,32)
NetU4_3: U4.3 U6.7 | length 30.3
  Top Layer w0.3: U6.7 23.817,35.915 23.137,35.915 22.839,35.617 22.839,32.642 27.451,28.029 27.451,25.411 27.703,25.159 42.939,25.159 43.555,25.776 U4.3
NetU4_4: U4.4 U6.12 | length 19.9
  Top Layer w0.3: U6.12 27.635,30.791 28.727,29.7 39.141,29.7 42.025,26.816 42.169,26.816 42.285,26.699 U4.4
NetU4_5: U4.5 U6.8 | length 22.5
  Top Layer w0.3: U6.8 24.398,35.218 24.501,35.115 24.501,33.047 25.55,31.999 25.55,31.731 27.606,29.675 27.644,29.675 28.119,29.2 38.371,29.2 40.755,26.816 40.899,26.816 41.015,26.699 U4.5
NetU4_6: U4.6 U6.13 | length 16.2
  Top Layer w0.5: v1(28.4,31.525) 28.4,31.552 28.435,31.587 U6.13 ; v1(32.574,28.55) 37.829,28.55 39.745,26.634 U4.6
  Bottom Layer w0.5: v1(28.4,31.525) 31.375,28.55 v1(32.574,28.55)
NRES: C10.2 J5.10 U6.4 | length 32.4
  Top Layer w0.3: C10.2 22.277,38.75 22.202,38.675 22.458,38.418 U6.4 23.951,38.388 26.613,38.388 29.625,35.375 v1(30.45,35.375) ; v1(37.825,35.85) 37.825,33.717 38.001,33.541 42.159,33.541 42.875,32.825 47.999,32.825 48.449,33.275 48.449,34.644 J5.10
  Bottom Layer w0.3: v1(30.45,35.375) 31,35.925 37.669,35.925 37.744,35.85 v1(37.825,35.85)
nSLEEP: R1.1 R5.1 R9.1 U1.3 U3.3 U4.11 U5.3 | length 48.5
  Top Layer w0.2: R1.1@20.7,12.05 21.425,12.775 21.425,14.299 21.626,14.5 21.704,14.5 21.83,14.626 v1(21.83,16.072) ; v1(30.9,16) 29.8,14.9 29.8,12.8 30.213,12.387 30.563,12.387 32.125,10.825 U3.3 ; U4.11 39.745,16.97 39.3,16.525 v1(39.3,15.675) 39.3,15.567 39.619,15.247 39.619,12.218 39.937,11.9 R9.1@40.925,11.9 ; R9.1 41.1,11.95 41.725,11.325 41.725,11.2 42.1,10.825 U5.3
  Top Layer w0.254: R1.1 20.7,12.05 21.925,10.825 U1.3
  Bottom Layer w0.2: v1(21.83,16.072) 21.934,16.072 22.307,15.7 30.492,15.7 30.792,16 31.008,16 31.339,15.669 34.295,15.669 34.376,15.75 35.524,15.75 35.605,15.669 38.374,15.669 38.38,15.675 v1(39.3,15.675)
PGND: C1.1 C2.1 C5.2 C8.1 C9.1 C12.2 C13.1 C14.1 C20.1 C21.1 C24.1 C25.1 C26.1 C27.1 C28.1 C29.1 C30.1 C31.1 C32.1 CON7.1 CON10.1 J4.1 Q1.G R2.2 R3.2 R4.2 R6.2 R7.2 R8.2 R10.2 R11.2 R12.2 R13.1 R14.1 R15.1 U1.6 U1.11 U1.14 U2.9 U2.15 U3.6 U3.11 U3.14 U4.9 U4.15 U5.6 U5.11 U5.14 U8.2 | length 53.5
  Top Layer w0.2: v1(23.55,16.675) 23.611,16.614 23.611,15.975 23.125,15.489 23.125,14.093 22.832,13.8 22.45,13.8 22.254,13.604 R3.2 22.3,13.55 22.879,12.971 22.879,12.671 23.2,12.35 U1.14 ; U1.11 25.836,13.386 26.1,13.65 R4.2 25.95,13.9 v1(25.95,16.55) ; R2.2 v1(28.4,16.325)
  Top Layer w0.254: v1(33.8,16.575) 35.013,16.575 35.925,15.663 35.925,13.7 R8.2 36.023,13.602 U3.11@36.023,12.523 ; R6.2 38.25,13.55 v1(38.25,16.5) ; R11.2 42.55,13.5 v1(42.55,16.65) ; R11.2@42.6,13.45 43.082,12.968 43.182,12.968 43.182,12.743 43.5,12.425 U5.14@44.694,12.425 ; v1(44.007,16.357) 46.032,14.332 46.032,13.812 46.194,13.65 46.194,12.614 46.196,12.612 U5.11 46.196,11.725 ; 44.546,8.225 46.346,8.225
  Top Layer w0.3: 33.725,12.4 34.5,12.4 34.525,12.375 U3.14
  Top Layer w0.4: U1.6@24.186,8.812 24.311,8.812 24.311,8.087 24.336,8.062 24.336,8.05 24.411,7.975 24.45,7.975 24.887,7.538 ; 24.746,7.375 24.871,7.5 24.925,7.5 24.887,7.538 ; U1.6@24.836,8.062 24.887,8.011 24.887,7.538 ; 24.925,7.65 25.336,8.062 25.836,8.062 25.861,8.087 25.861,8.812 U1.6@25.987,8.812
  Top Layer w0.5: U2.9 21.755,20.341 23.581,18.515 23.581,18.044 v1(23.6,18.025) ; v1(29.375,19.291) U2.15 ; v1(32.425,14.975) 32.425,14.948 32.375,14.898 R7.2 32.475,13.65 33.725,12.4 ; U4.15 44.841,20.777 44.841,19.228 v1(44.875,19.194) 44.894,19.194 C12.2 ; R10.2@48.376,13.576 R10.2 48.326,15.724 48.601,15.999 v1(48.601,16.026)
  other v1: 10.739,0.775 11.495,0.775 12.251,0.775 13.008,0.775 13.764,0.775 0.8,0.813 1.556,0.813 2.312,0.813 3.069,0.813 3.825,0.813 10.739,1.544 11.495,1.544 12.264,1.544 13.008,1.544 13.764,1.544 0.8,1.581 1.556,1.581 2.325,1.581 3.069,1.581 3.825,1.581 10.739,2.312 11.495,2.312 12.264,2.312 13.008,2.312 13.764,2.312 0.8,2.35 1.556,2.35 2.325,2.35 3.069,2.35 3.825,2.35 10.739,3.081 11.495,3.081 12.264,3.081 13.008,3.081 13.764,3.081 0.8,3.119 1.556,3.119 2.325,3.119 3.069,3.119 3.825,3.119 10.739,3.85 11.495,3.85 12.264,3.85 13.008,3.85 13.764,3.85 0.8,3.888 1.556,3.888 2.325,3.888 3.069,3.888 3.825,3.888 36.939,4.818 33.494,4.846 34.175,4.838 34.875,4.838 35.575,4.838 36.275,4.838 47.064,4.897 26.814,4.905 44.3,4.917 45,4.917 45.7,4.917 46.4,4.917 23.369,4.934 24.05,4.925 24.75,4.925 25.45,4.925 26.15,4.925 43.619,4.925 36.939,5.501 33.494,5.529 34.175,5.521 34.875,5.521 35.575,5.521 36.275,5.521 47.064,5.58 24.05,5.608 24.75,5.608 25.45,5.608 26.15,5.608 26.814,5.589 43.619,5.609 44.3,5.6 45,5.6 45.7,5.6 46.4,5.6 23.375,5.625 36.939,6.184 33.494,6.213 34.175,6.204 34.875,6.204 35.575,6.204 36.275,6.204 47.064,6.264 24.05,6.292 24.75,6.292 25.45,6.292 26.15,6.292 26.814,6.272 43.619,6.292 44.3,6.283 45,6.283 45.7,6.283 46.4,6.283 23.369,6.3 36.939,6.868 33.494,6.896 34.175,6.888 34.875,6.888 35.575,6.888 36.275,6.888 47.064,6.947 23.369,6.955 24.058,6.955 24.747,6.955 25.436,6.955 26.125,6.955 26.814,6.955 43.619,6.975 44.3,6.967 45,6.967 45.7,6.967 46.4,6.967 47.2,16.3 47.9,16.3 49.264,16.28 47.2,16.983 47.9,16.983 48.6,16.983 49.264,16.964 37.205,20.794 4.906,20.831 5.663,20.831 6.406,20.831 7.175,20.831 7.931,20.831 4.906,21.6 5.663,21.6 6.406,21.6 7.175,21.6 7.931,21.6 44.113,22.1 44.837,22.115 45.538,22.1 46.306,22.1 47.075,22.1 47.844,22.1 48.612,22.1 49.337,22.115 2,37.5 6.425,37.5 4.25,37.55
PWM_D_M1_P: U1.10 U2.13 | length 9.1
  Top Layer w0.254: U1.10 26.487,12.874 26.777,13.165 26.777,20.745 U2.13
PWM_D_M2_P: U2.11 U3.10 | length 19.6
  Top Layer w0.254: v1(34.05,20.475) 34.558,19.967 34.558,18.68 36.675,16.563 U3.10
  Bottom Layer w0.254: v1(24.295,20.803) 33.242,20.803 33.504,20.541 33.984,20.541 v1(34.05,20.475)
PWM_D_M3_P: U4.13 U5.10 | length 10.9
  Top Layer w0.2: U4.13 42.285,20.575 42.36,20.5 42.36,18.84 44.243,16.957 44.256,16.957 44.607,16.606 44.607,16.593 46.846,14.354 U5.10
PWM_M1_P: U1.9 U2.14 | length 10.3
  Top Layer w0.2: U1.9 26.512,11.35 26.853,11.35 27.527,12.023 27.527,18.427 28.105,19.005
  Top Layer w0.254: 28.105,19.005 U2.14
PWM_M2_P: U2.12 U3.9 | length 22.6
  Top Layer w0.2: 35.477,18.403 37.275,16.605 37.275,11.583 37.042,11.35 36.7,11.35 U3.9
  Top Layer w0.254: U2.12 25.565,20.853 25.565,21.315 26.325,22.075 35.328,22.075 35.477,21.926 35.477,18.403
PWM_M3_P: U4.14 U5.9 | length 11.5
  Top Layer w0.2: U4.14 43.555,20.575 43.63,20.5 43.63,18.22 47.446,14.404 47.446,11.583 47.213,11.35 46.871,11.35 U5.9
PWM_thrower_P: J4.2 U4.12 | length 60.1
  Top Layer w0.5: v1(40.875,21.8) 40.875,21.773 40.999,21.649 40.999,20.81 U4.12
  Bottom Layer w0.4: 7.225,23.325 8.75,21.8 v1(40.875,21.8)
  Bottom Layer w0.5: J4.2 7.225,43.205 7.225,37.636 ; 7.225,23.325 7.225,39.636
SWCLK: J5.04 U6.24 | length 17.1
  Top Layer w0.5: U6.24 32.153,40.822 32.97,40.822 33.023,40.875 v1(33.05,40.875)
  Bottom Layer w0.5: v1(33.05,40.875) 35.75,40.875 37.475,39.15 43.757,39.15 44.855,38.052 v1(44.855,34.86)
SWDIO: J5.02 U6.23 | length 15.3
  Top Layer w0.5: U6.23 32.153,40.015 33.085,40.015 v1(33.1,40)
  Bottom Layer w0.5: v1(33.1,40) 35.635,40 37.435,38.2 43.25,38.2 43.585,37.865 v1(43.585,34.86)
USB_D_N: J6.2 U6.21 U7.4 | length 20.5
  Top Layer w0.35: U6.21 32.228,38.497 32.863,38.497 32.882,38.516 36.449,38.516 36.545,38.421 40.991,38.421 41.241,38.671 44.143,38.671 45.977,40.505 45.977,41.045 46.182,41.25 ; J6.2 46.177,45.156 46.177,43.732 45.977,43.532 45.977,41.455 46.182,41.25 ; U7.4 46.182,41.25
USB_D_P: J6.3 U6.22 U7.3 | length 19.5
  Top Layer w0.35: U6.22 32.228,39.14 32.863,39.14 32.882,39.12 36.7,39.12 36.795,39.025 40.74,39.025 40.99,39.275 43.893,39.275 45.373,40.755 45.373,41.045 45.168,41.25 ; U7.3 45.168,41.25 ; J6.3 45.573,45.156 45.573,43.983 45.373,43.783 45.373,41.455 45.168,41.25
pads on no net: J1. J2. J3. J4. J4.3 J4.4 J5.06 J5.07 J5.08 J6.4 J6.S6 U1.1 U1.13 U2.7 U2.10 U3.1 U3.13 U4.7 U4.10 U5.1 U5.13 U6.2 U6.3 U6.9 U6.26 U6.27 U6.28 U7.1 U8.4 U9.4

## Polygon pours and split planes (outlines as drawn)
PGND on GND_b "PGND_L03_P000" (solid, pour order 0): 0.33,22.4 0.306,0.25 49.725,0.275 49.725,22.4
GND on GND_b "GND_L03_P001" (solid, pour order 1): 9.954,49.737 9.992,25 49.737,25 49.737,49.737
PGND on GND_b "PGND_L03_P052" (solid, pour order 52): 0.371,49.85 8.425,49.85 8.425,22.4 0.321,22.4
PGND on GND_t "PGND_L02_P002" (solid, pour order 2): 0.35,22.425 49.725,22.425 49.725,-0.5 0.35,-0.5
GND on GND_t "GND_L02_P003" (solid, pour order 3): 9.95,50 50.45,50 50.45,24.975 9.95,24.975
PGND on GND_t "PGND_L02_P050" (solid, pour order 50): 0.374,49.7 8.425,49.7 8.425,22.425 0.324,22.425
+16V on Top Layer "+16V_L01_P026" (solid, pour order 26): 31.573,10.975 31.725,10.975 32.225,10.475 32.225,9.775 31.573,9.198
+16V on Top Layer "+16V_L01_P023" (solid, pour order 23): 28.503,11.35 28.453,9.325 31.703,9.3 31.678,9.325 31.628,11.35
+16V on Top Layer "+16V_L01_P028" (solid, remove dead copper, pour order 28): 45.55,10.55 45.55,10 49.825,10 49.825,11.8 48.45,11.8 47.2,10.55
+16V on Top Layer "+16V_L01_P020" (solid, pour order 20): 25,10.5 25,9.975 22.113,9.975 19.125,6.988 18.788,6.988 18.788,11.55 19.888,11.55 20.938,10.5
+16V on Top Layer "+16V_L01_P039" (solid, pour order 39): 3.925,15.2 3.95,15.175 17.375,15.175 17.375,11.075 17.325,11.025 17.45,10.9 20.05,10.9 20.05,17.775 4.6,17.775 3.925,17.1
+5V on Top Layer "+5V_L01_P049" (solid, remove dead copper, pour order 49): 37.075,39.15 37.075,42.875 40.775,42.875 40.775,39.15 37.05,39.15
PGND on Top Layer "PGND_L01_P041" (solid, pour order 41): 4.225,22.3 4.225,18.7 4.95,17.975 19.8,17.975 19.8,22.253
+16V on Top Layer "+16V_L01_P045" (solid, pour order 45): 4.525,17.35 0.375,17.35 0.375,11.35 0.384,11.341 2.796,11.341 2.796,16.396 2.8,16.4 4.375,16.25
BAT+ on Top Layer "BAT+_L01_P029" (solid, pour order 29): 5.275,3.85 5.275,12.625 14.35,12.625 14.35,7.275 14.35,4.45 9.275,4.45 9.275,3.85
NetCON8_1 on Top Layer "NETCON8_1_L01_P018" (solid, pour order 18): 45.5,9.75 49.775,9.75 49.825,9.7 49.825,0.242 45.5,0.28
NetCON6_1 on Top Layer "NETCON6_1_L01_P014" (solid, pour order 14): 45.3,9.75 40.325,9.75 40.325,0.25 45.3,0.25
NetCON4_1 on Top Layer "NETCON4_1_L01_P013" (solid, pour order 13): 35.375,9.825 40.175,9.825 40.175,0.225 35.375,0.225
NetCON3_1 on Top Layer "NETCON3_1_L01_P012" (solid, pour order 12): 35.175,9.761 35.175,0.275 30.025,0.275 30.025,9.761
NetCON2_1 on Top Layer "NETCON2_1_L01_P011" (solid, pour order 11): 25.2,9.75 30.025,9.75 30.025,0.225 25.2,0.225
NetCON1_1 on Top Layer "NETCON1_1_L01_P010" (solid, pour order 10): 20.3,9.75 20.3,0.225 24.988,0.225 25.013,9.75
PGND on Top Layer "PGND_L01_P007" (solid, pour order 7): 23.1,9.254 27.125,9.254 27.125,4.425 23.1,4.425
PGND on Top Layer "PGND_L01_P005" (solid, pour order 5): 43.3,9.1 47.5,9.1 47.5,4.4 43.3,4.4
PGND on Top Layer "PGND_L01_P004" (solid, pour order 4): 33.211,9.075 33.65,9.075 37.305,9.028 37.305,4.394 33.211,4.394
+5V_P on Top Layer "+5V_P_L01_P043" (solid, pour order 43): 0.325,22.525 0.325,17.45 3.725,17.45 3.75,17.425 3.8,17.475 3.8,22.525
PGND on Top Layer "PGND_L01_P038" (solid, pour order 38): 6.6,14.95 17.15,14.95 17.15,11.025 14.6,11.025 14.6,12.9 14.625,12.925 6.6,12.925
PGND on Top Layer "PGND_L01_P008" (solid, pour order 8): 0.35,4.225 0.35,11.075 2.725,11.075 2.975,11.475 2.975,16.175 3.675,16.175 3.675,14.95 6.6,14.95 6.6,8.9 4.2,6.5 4.2,4.225
+16V on Top Layer "+16V_L01_P019" (solid, pour order 19): 14.575,0.268 14.575,7.65 14.575,10.9 18.875,10.9 18.875,9.8 20.3,9.8 20.3,0.232
+16V on Top Layer "+16V_L01_P027" (solid, pour order 27): 35.375,10.5 35.376,10.499 35.376,10 45.35,10 45.35,10.5
+16V on Top Layer "+16V_L01_P047" (solid, pour order 47): 37.9,10.475 38.65,11.225 41.175,11.225 42,10.4 42,10.1 40.9,9.075 38.922,9.075 37.9,10.075
+16V on Top Layer "+16V_L01_P031" (solid, pour order 31): 44.171,10.5 46.529,10.5 46.529,10.005 46.53,10.004 46.505,9.979 44.155,9.979
+16V on Top Layer "+16V_L01_P022" (solid, pour order 22): 35.175,10 25.2,10 25.2,10.5 35.175,10.5 35.175,10.025
+16V on Top Layer "+16V_L01_P032" (solid, pour order 32): 23.908,10.51 26.266,10.51 26.266,10.016 26.267,10.015 26.242,9.99 23.892,9.99
+16V on Top Layer "+16V_L01_P025" (solid, pour order 25): 28.503,11.35 28.559,9.898 27.728,9.898 27.728,10.398
+16V on Top Layer "+16V_L01_P030" (solid, pour order 30): 34.058,10.51 36.416,10.51 36.416,10.016 36.417,10.015 36.392,9.99 34.042,9.99
PGND on Bottom Layer "PGND_L04_P048" (solid, pour order 48): 14.225,16.053 49.725,15.9 49.725,18.475 14.225,18.475
+16V on Bottom Layer "+16V_L04_P036" (solid, pour order 36): 18.875,15.756 49.85,15.756 49.85,9.774 19,9.9 19,12.156 19,4.156 14.875,4.156 14.825,15.756
+3.3V on Bottom Layer "+3.3V_L04_P046" (solid, remove dead copper, pour order 46): 29.922,35.475 46.675,35.475 46.675,26.65 10.075,26.65 10.075,49.7 39.05,49.7 39.05,39 19.1,39 19.1,28.85 29.75,28.85
+5V_P on Bottom Layer "+5V_P_L04_P037" (solid, pour order 37): 49.738,22.275 49.765,18.225 2.275,18.225 2.275,22.275
PGND on Bottom Layer "PGND_L04_P017" (solid, pour order 17): 0.275,18.05 14.448,18.05 14.35,0.3 0.275,0.3
PGND on Bottom Layer "PGND_L04_P034" (solid, pour order 34): 49.975,0.105 49.975,9.575 19.2,9.8 19.2,0.249
+16V on Bottom Layer "+16V_L04_P035" (solid, pour order 35): 18.975,4.675 14.875,4.675 14.875,0.225 18.975,0.225

## Other copper
Top Layer:
  pour cut-out: 35.12,9.093 35.047,9.02 35.047,8.979

## Silkscreen, mask and mechanical layers (free items; w line width, h text height)
Top Overlay:
  lines w0.254: 0.425,25.575 8.45,25.575 ; 1.925,29.079 1.925,30.375 ; 4.192,27.466 4.192,30.365 ; 6.475,29.204 6.475,30.5 ; 11.717,27.566 11.717,30.465 ; 14.175,29.179 14.175,30.475 ; 17.988,27.9 17.988,30.225 ; 0.55,29.798 8.225,29.798 8.225,39.898 0.55,39.898 0.55,29.798 ; 10.05,29.8 15.6,29.8 15.6,39.9 10.05,39.9 10.05,29.8 ; 16.45,29.8 19.525,29.8 19.525,39.9 16.45,39.9 16.45,29.8
  text "+16V" at 0.425,27.85 h0.8
  text "+5V" at 5.05,27.85 h0.8
  text "+5V" at 12.675,27.85 h0.8
  text "BAT+" at 2.6,26.225 h0.8
  text "+3.3V" at 9.75,26.225 h0.8
  text "Debug / LED" at 14.95,25.075 h0.8
  text "Isolated / Voltages" at 1.1,22.7 h0.8
Bottom Overlay:
  lines w0.254: 4.774,1.11 4.774,4.371 ; 5.288,12.475 17.487,12.475 ; 14.774,1.11 14.774,4.371 ; 25.024,1.11 25.024,4.371 ; 35.024,1.11 35.024,4.371 ; 45.024,1.11 45.024,4.371 ; 0.4,0.467 9.813,0.467 9.813,4.847 0.4,4.847 0.4,0.467 ; 1,43.9 9,43.9 9,49.1 1,49.1 1,43.9 ; 10.003,43.901 18.1,43.901 18.1,49.101 10.003,49.101 10.003,43.901 ; 10.188,0.46 19.802,0.46 19.802,4.84 10.188,4.84 10.188,0.46 ; 19.703,43.901 27.8,43.901 27.8,49.101 19.703,49.101 19.703,43.901 ; 20.184,0.456 29.798,0.456 29.798,4.836 20.184,4.836 20.184,0.456 ; 29.503,43.901 37.6,43.901 37.6,49.101 29.503,49.101 29.503,43.901 ; 30.184,0.457 39.798,0.457 39.798,4.836 30.184,4.836 30.184,0.457 ; 40.181,0.448 49.6,0.448 49.6,4.828 40.181,4.828 40.181,0.448
  text "Thrower / PWM" at 7.249,41.3 h0.8
  text "Motor 1 / Encoder" at 16.349,41.3 h0.8
  text "Motor 2 / Encoder" at 26.249,41.3 h0.8
  text "Motor 3 / Encoder" at 35.949,41.3 h0.8
  text "Team Jordan v1.0 /  /  Veronika Podliesnova /  Leonid Tsigrinski  /  Valentin Resapow" at 17.9,6.9 h0.8
  text "BAT-" at 3.8,2.2 h0.8
  text "BAT+" at 8.6,2.1 h0.8
  text "THR-" at 14,2.1 h0.8
  text "THR+" at 18.6,2.1 h0.8
  text "M1-" at 23.5,2.1 h0.8
  text "M1+" at 28.4,2.1 h0.8
  text "M2-" at 33.6,2.1 h0.8
  text "M2+" at 38.5,2.1 h0.8
  text "M3-" at 43.7,2.1 h0.8
  text "M3+" at 48.5,2.1 h0.8
Mechanical 1:
  the board outline again, w0.6

## Text inside footprints (layer, text, board x,y; h text height)
U2: Top Overlay "*" at 29.883,25.43 h1.27 r270
U4: Top Overlay "*" at 45.333,25.421 h1.27 r270
U6: Top Overlay "*" at 23.209,40.939 h1.27; Mechanical 13 "*" at 24.593,40.583 h1.27